# Altium PCB CW308T_CEC1702.PcbDoc
Units mil, origin at the board's own origin, x right, y up, seen from the top; angles counter-clockwise.
Board outline 2064 x 2542.07 mil, 4 copper layers (Top Layer, Ground Plane, Power, Bottom Layer), stack 33.234 mil thick; 35 components, 48 nets, 239 pads, 123 vias.
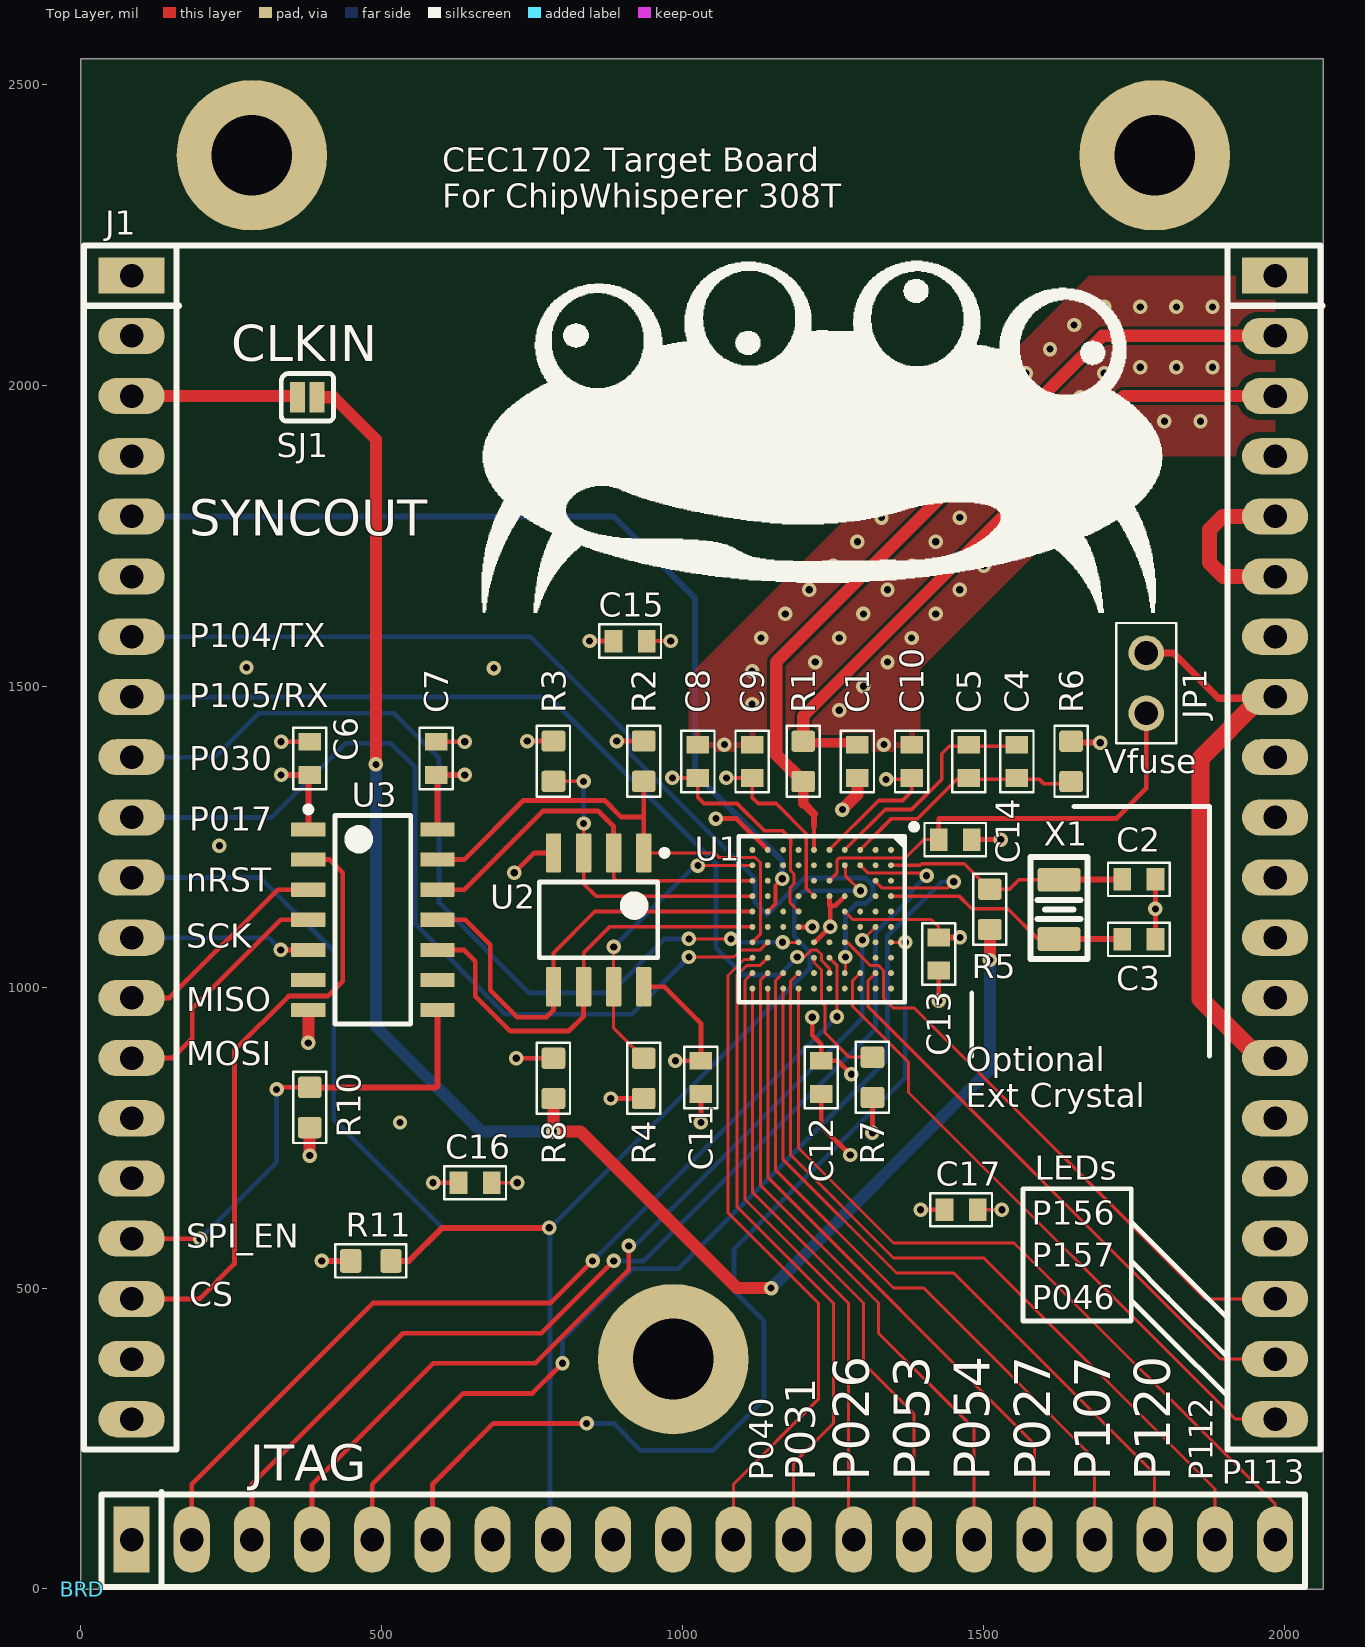
[diagram p0: Top Layer view]
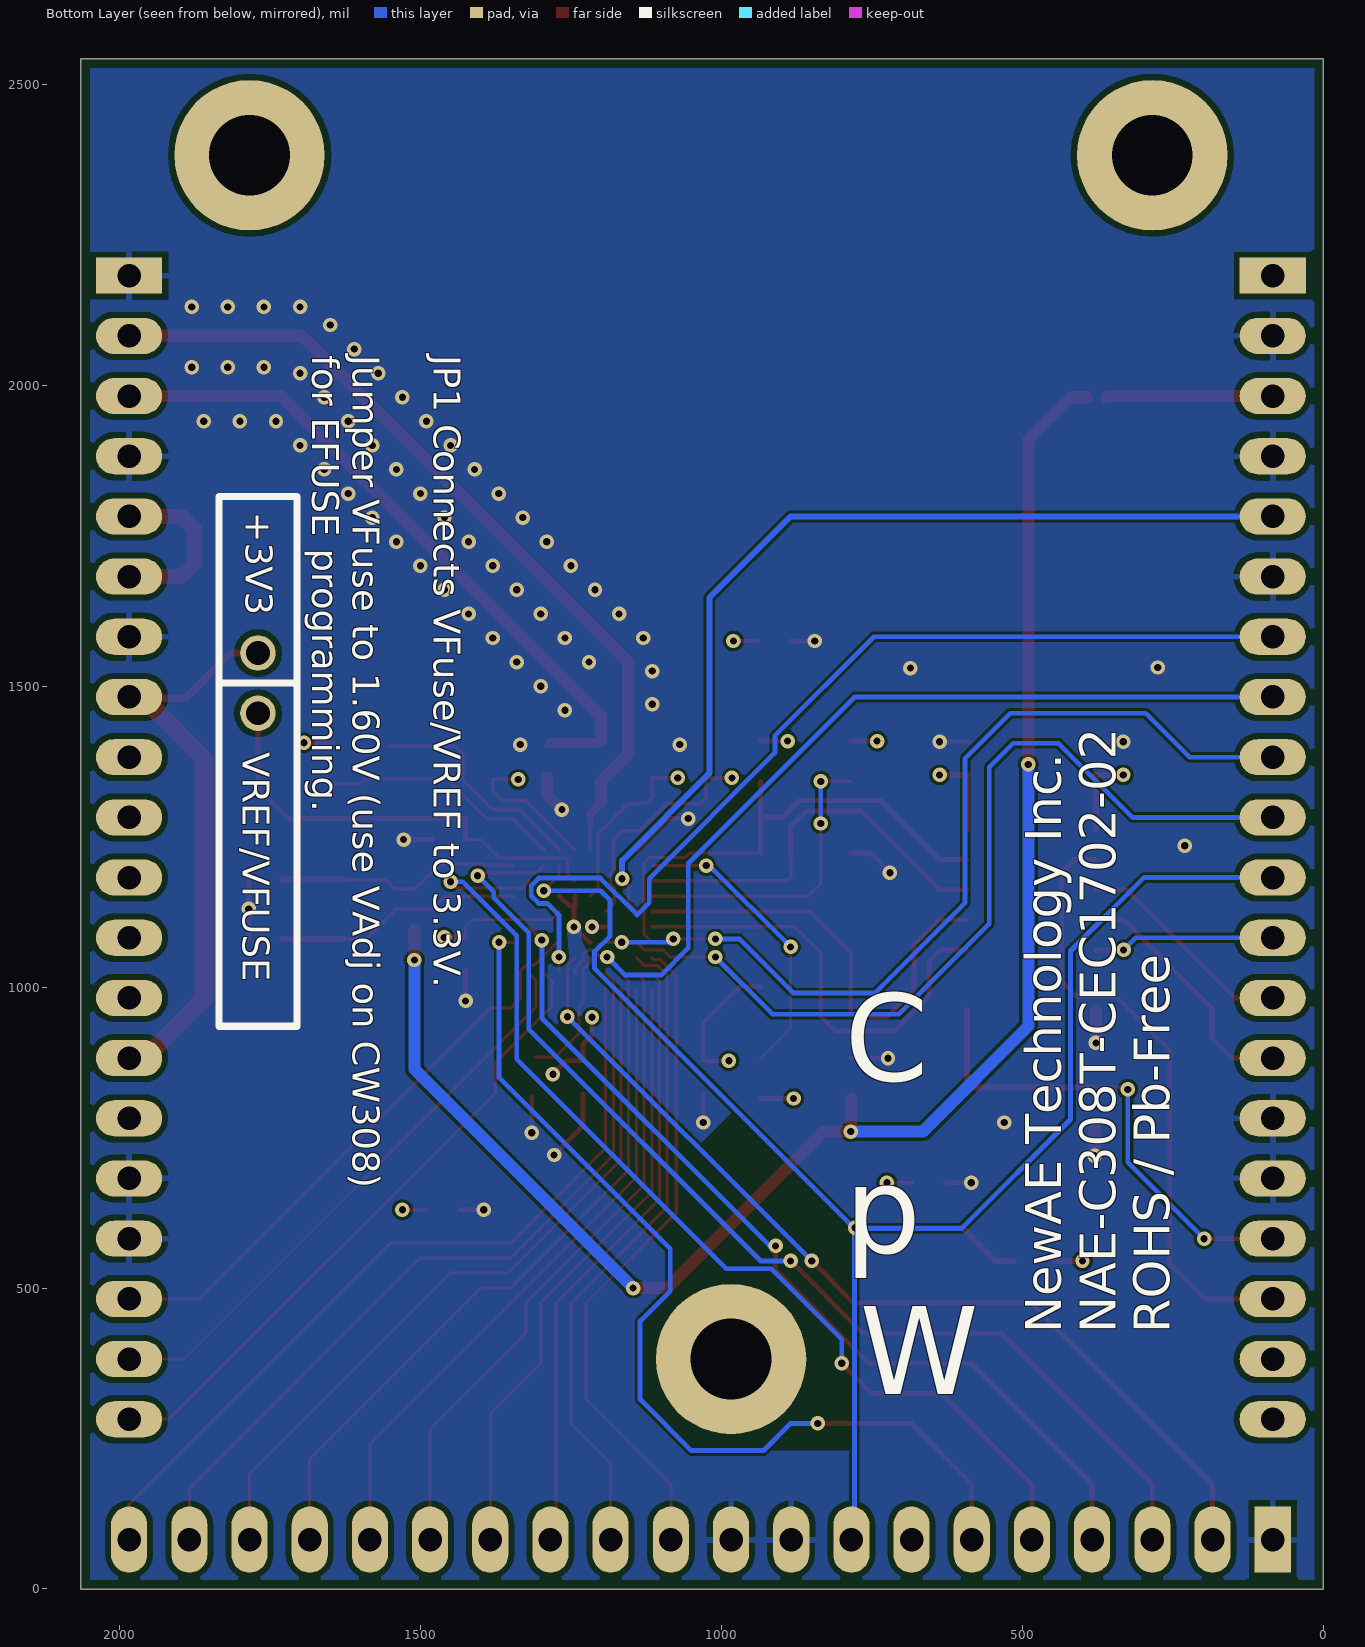
[diagram p1: Bottom Layer view, seen from below]
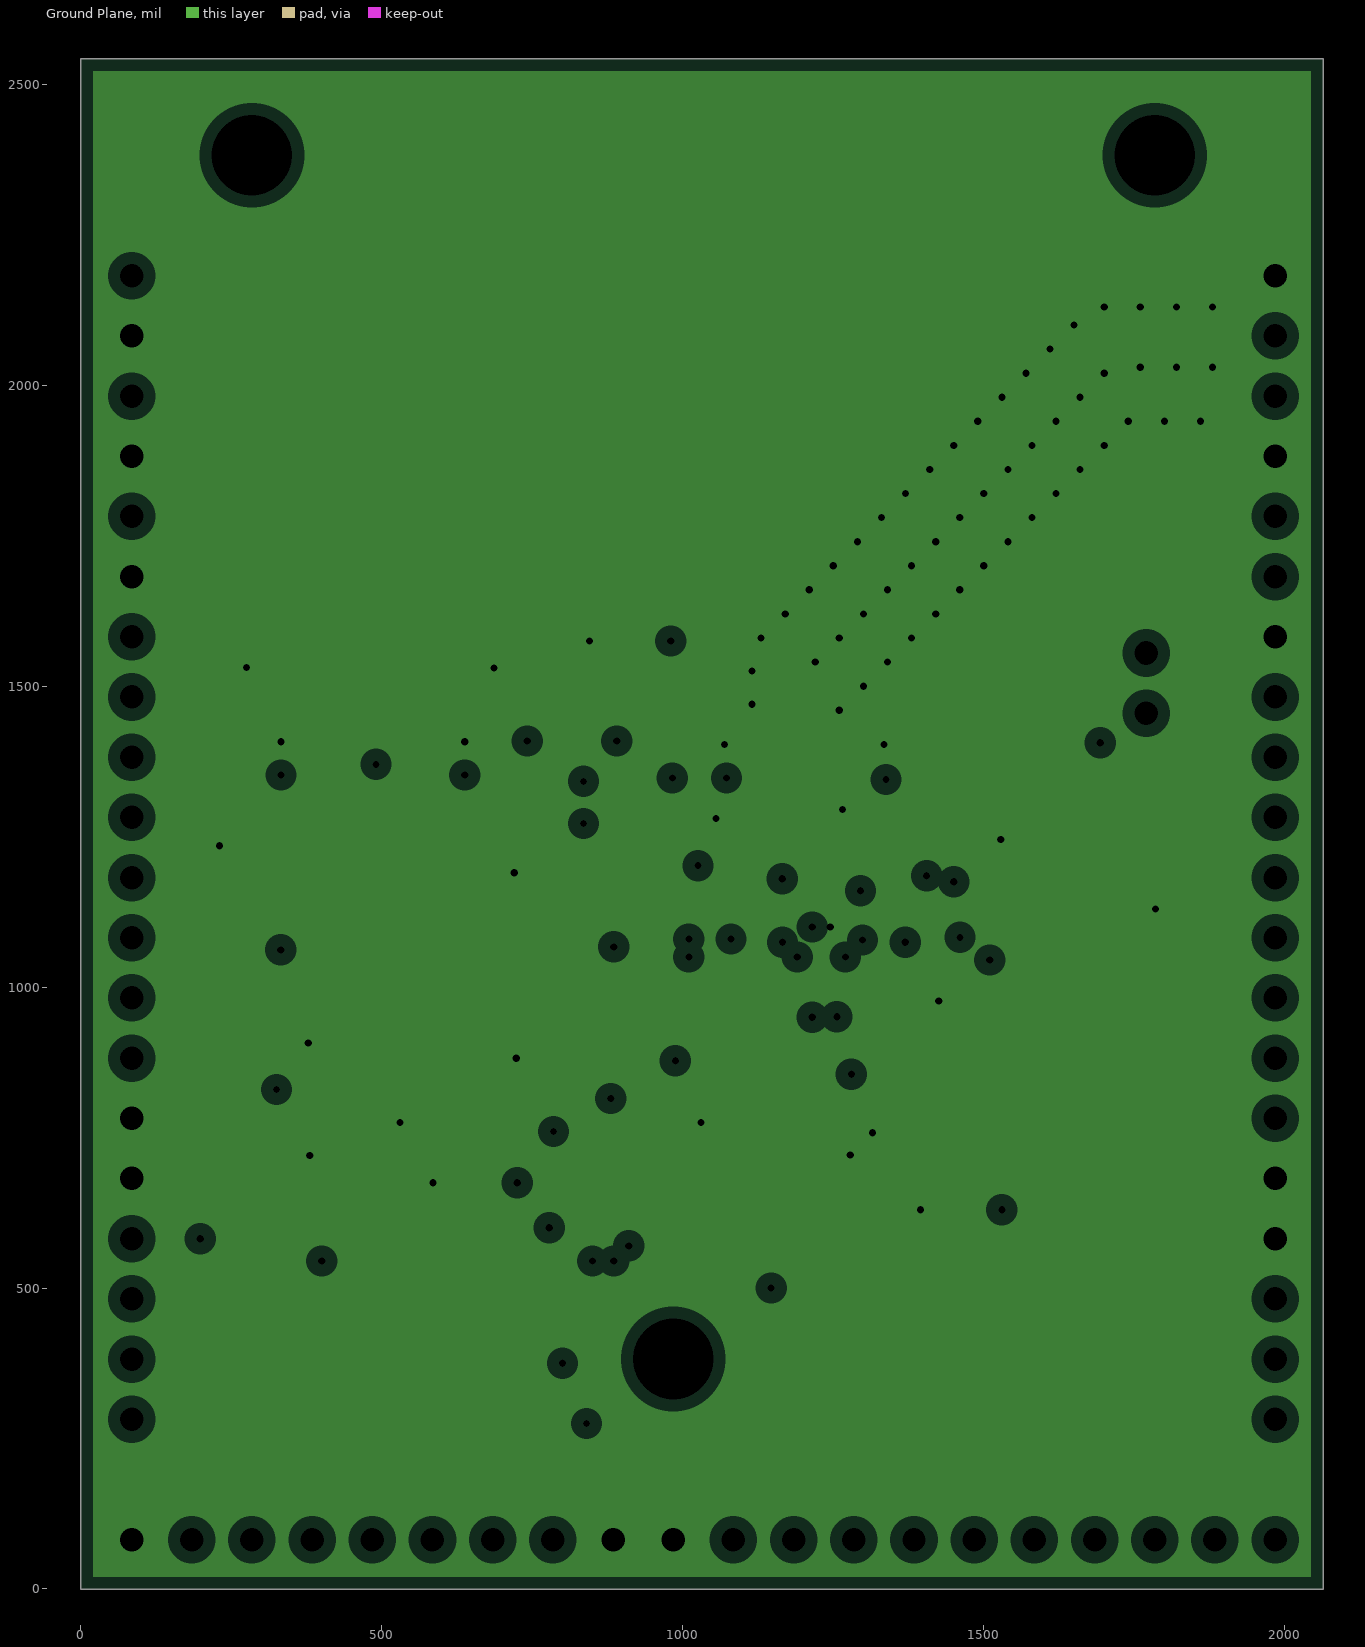
[diagram p2: Ground Plane, clearances drawn from the general rule]
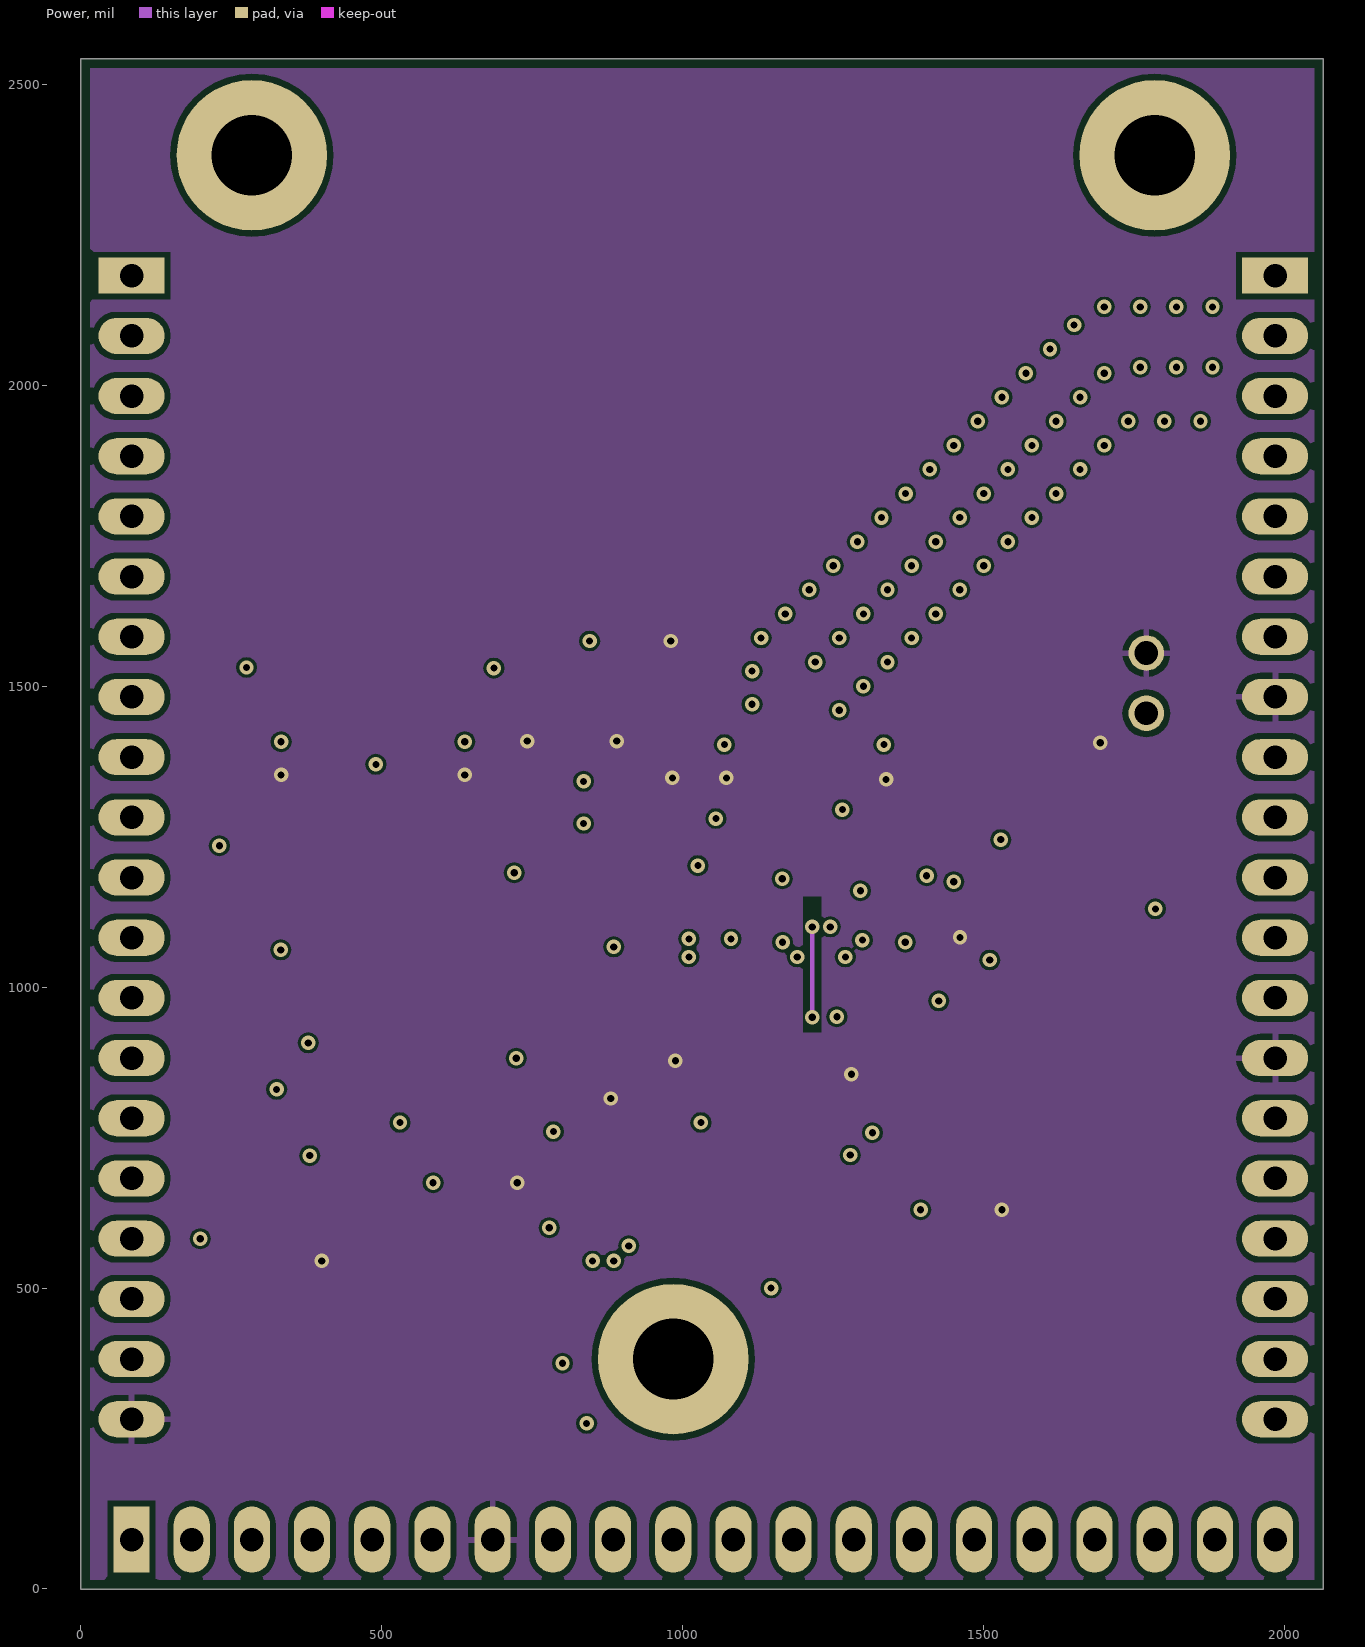
[diagram p3: Power]

## Layer stack, top to bottom
Top Solder: solder mask 0.4, Solder Resist, Dk 3.5
Top Layer: signal copper 1.4
Dielectric 1: core 12.6, FR-4, Dk 4.8
Ground Plane: plane copper 1.417, net GND
Dielectric 4: prepreg 5, Dk 4.2
Power: signal copper 1.417
Dielectric 3: core 10, FR-4, Dk 4.2
Bottom Layer: signal copper 1.4
Bottom Solder: solder mask 0.4, Solder Resist, Dk 3.5

## Board outline
0,-0.07 2064,-0.07 2064,2542 0,2542

## Design rules (kind name [scope] priority, off if disabled: settings)
BoardOutlineClearance Silk_to_Edge [InComponent('J1')] p1: gap=0 ignorepadtopadclearanceinfootprint=FALSE
BoardOutlineClearance [All] p2: gap=15 ignorepadtopadclearanceinfootprint=FALSE except(0: Arc-SplitContinuation Track-SplitContinuation SMDPad-SplitContinuation THPad-SplitContinuation Via-SplitContinuation Fill-SplitContinuation Poly-SplitContinuation Region-SplitContinuation Text-SplitContinuation)
Clearance Polygon_mask_backoff [InPolygon] p1: gap=5 ignorepadtopadclearanceinfootprint=FALSE except(10: THPad-Fill THPad-Poly THPad-Region)
Clearance [All] p2: gap=5 ignorepadtopadclearanceinfootprint=FALSE
HoleSize [All] p1: absolutevalues=TRUE maxlimit=200 minlimit=1 maxpercent=80.000 minpercent=20.000
MinimumSolderMaskSliver [All] p1: minsoldermaskwidth=5
PlaneClearance [All] p1: clearance=20
PlaneConnect PlaneConnect_viaDirect [IsVia] p1: planeconnectstyle=Direct reliefexpansion=20 reliefentries=4 reliefconductorwidth=10 reliefairgap=10
PlaneConnect [All] p2: planeconnectstyle=Relief reliefexpansion=20 reliefentries=4 reliefconductorwidth=10 reliefairgap=10
PolygonConnect PolygonConnect_viaDirect [All vs isVia] p1: connectstyle=Direct reliefconductorwidth=10 reliefentries=4 polygonreliefangle="90 Angle" airgapwidth=10
PolygonConnect [All] p2: connectstyle=Relief reliefconductorwidth=10 reliefentries=4 polygonreliefangle="90 Angle" airgapwidth=10
RoutingVias [All] p1: holewidth=28 width=50 viastyle="Through Hole" minholewidth=28 minwidth=50 maxholewidth=28 maxwidth=50 useviatemplates=TRUE viatemplateguid#1={88F1283D-34FA-4616-BE75-1AF10DC911EB} viatemplateguid#2={8DC45064-EA7F-4C5A-B7B5-789F292C9CB1} viatemplateguid#3={2AA0C7FB-5734-4B87-82FC-11746B03C04B} viatemplatename#1=v61h30m0mx0 viatemplatename#2=v86h41m0mx0 viatemplatename#3=v127h71m0mx0
SilkToSilkClearance [All] p1: silktosilkclearance=5
SilkToSolderMaskClearance [IsPad] p1: minsilkscreentomaskgap=1 clearancetoexposedcopper=TRUE
SolderMaskExpansion [All] p1: expansion=4
Width [All] p1: maxlimit=100 minlimit=5 preferedwidth=8 midlayer1_maxwidth=10 minimp=50.000000 maximp=50.000000 favimp=50.000000
24 further rules are at their usual default settings.

## Classes and differential pairs
component class CW308T_CEC1702_MICRO: BRD C1 C2 C3 C4 C5 C14 JP1 R1 R2 R3 R4 R5 R6 R7 R8 R10 R11 SJ1 U1 U2 U3 X1
component class CW308T_CEC1702_UFO: C6 C7 C8 C9 C10 C11 C12 C13 C15 C16 C17 J1

## Components (designator, comment, footprint, x,y, rotation, side; value= is the part's Value field where it differs from the comment)
BRD "CW308_TBRDSIZE" CW308T_TBOARD_DEFSIZE 2.32,-0.07 r0 top locked
C1 "1u" CAPC0603_M 1290,1375 r90 top
C2 "10p" CAPC0603_M 1757.56,1179 r180 top
C3 "10p" CAPC0603_M 1757.56,1079.21 r180 top
C4 "470n" CAPC0603_M 1555,1375 r90 top
C5 "100n" CAPC0603_M 1475,1375 r90 top
C6 "100n" CAPC0603_M 380,1380 r90 top
C7 "100n" CAPC0603_M 590,1380 r90 top
C8 "100n" CAPC0603_M 1025,1375 r90 top
C9 "100n" CAPC0603_M 1115,1375 r90 top
C10 "100n" CAPC0603_M 1380,1375 r90 top
C11 "100n" CAPC0603_M 1030,850 r270 top
C12 "100n" CAPC0603_M 1230,850 r270 top
C13 "100n" CAPC0603_M 1425,1055 r270 top
C14 "100n" CAPC0603_M 1452.56,1245 r0 top
C15 "2u2" CAPC0603_M 912.44,1575 r180 top
C16 "2u2" CAPC0603_M 655,675 r180 top
C17 "2u2" CAPC0603_M 1462.44,630 r180 top
J1 "CW308_TARGETCON" CW308_TBOARD_CONN 84,2182 r0 top locked
JP1 "Jumper" 2x2.54mm_Header 1770,1455 r90 top
R1 "10R" RESC1608X55N 1200,1375 r270 top
R2 "100k" RESC1608X55N 935,1375.26 r270 top
R3 "100k" RESC1608X55N 785,1375.26 r270 top
R4 "100k" RESC1608X55N 935,848.33 r90 top
R5 "DNM" RESC1608X55N 1510,1129.21 r90 top value=100R
R6 "100R" RESC1608X55N 1645,1375 r270 top
R7 "10k" RESC1608X55N 1315,850 r270 top
R8 "910k" RESC1608X55N 785,848.33 r270 top
R10 "100k" RESC1608X55N 380,800 r90 top
R11 "10k" RESC1608X55N 481.54,545 r0 top
SJ1 "NC" SJ_2S_NC 376.22,1980 r0 top
U1 "CEC1702" 84L_WFBGA 1230.64,1112.8 r270 top
U2 "SST26VF016B" SOIC8_NARROW 860,1111.8 r270 top
U3 "TXB0104" "SOIC14 (R-PDSO-G14)" 485,1111.8 r0 top
X1 "32.768kHz" FC-135 1625,1129.21 r270 top

## Footprints (in the part's own frame and the unit in brackets; to place one, negate y for a bottom-side part, rotate by r counter-clockwise, add the part's x,y. Pads: shape width x height; smd on the part's side, far side on the other; paste and mask are expansions set on the pad)
2x2.54mm_Header [mm]
  round 1.5 hole 1: 1(0,0) 2(2.54,0)
  silkscreen extent -1.27,-1.27 3.81,1.27, body extent -1.27,-1.27 3.81,1.27, height 9.5
84L_WFBGA [mm] "BGA, 84-Leads, Body 7.00x7.00mmx0.80mm, Pitch 0.65mm"
  round 0.25 smd paste-0.051 mask+0.05: A1(-2.925,2.925) A2(-2.275,2.925) A3(-1.625,2.925) A4(-0.975,2.925) A5(-0.325,2.925) A6(0.325,2.925) A7(0.975,2.925) A8(1.625,2.925) A9(2.275,2.925) A10(2.925,2.925) B1(-2.925,2.275) B2(-2.275,2.275) B3(-1.625,2.275) B4(-0.975,2.275) B5(-0.325,2.275) B6(0.325,2.275) B7(0.975,2.275) B8(1.625,2.275) B9(2.275,2.275) B10(2.925,2.275) C1(-2.925,1.625) C2(-2.275,1.625) C5(-0.325,1.625) C6(0.325,1.625) C9(2.275,1.625) C10(2.925,1.625) D1(-2.925,0.975) D2(-2.275,0.975) D4(-0.975,0.975) D5(-0.325,0.975) D6(0.325,0.975) D7(0.975,0.975) D9(2.275,0.975) D10(2.925,0.975) E1(-2.925,0.325) E2(-2.275,0.325) E3(-1.625,0.325) E4(-0.975,0.325) E7(0.975,0.325) E8(1.625,0.325) E9(2.275,0.325) E10(2.925,0.325) F1(-2.925,-0.325) F2(-2.275,-0.325) F3(-1.625,-0.325) F4(-0.975,-0.325) F7(0.975,-0.325) F8(1.625,-0.325) F9(2.275,-0.325) F10(2.925,-0.325) G1(-2.925,-0.975) G2(-2.275,-0.975) G4(-0.975,-0.975) G5(-0.325,-0.975) G6(0.325,-0.975) G7(0.975,-0.975) G9(2.275,-0.975) G10(2.925,-0.975) H1(-2.925,-1.625) H2(-2.275,-1.625) H5(-0.325,-1.625) H6(0.325,-1.625) H9(2.275,-1.625) H10(2.925,-1.625) J1(-2.925,-2.275) J2(-2.275,-2.275) J3(-1.625,-2.275) J4(-0.975,-2.275) J5(-0.325,-2.275) J6(0.325,-2.275) J7(0.975,-2.275) J8(1.625,-2.275) J9(2.275,-2.275) J10(2.925,-2.275) K1(-2.925,-2.925) K2(-2.275,-2.925) K3(-1.625,-2.925) K4(-0.975,-2.925) K5(-0.325,-2.925) K6(0.325,-2.925) K7(0.975,-2.925) K8(1.625,-2.925) K9(2.275,-2.925) K10(2.925,-2.925)
  silkscreen extent -4.02,-3.5 3.5,4.03, body extent -3.5,-3.5 3.5,3.5, height 0.8
CAPC0603_M [mm]
  rect 0.75x0.95 smd: 1(-0.7,0) 2(0.7,0)
  silkscreen extent -1.3,-0.7 1.3,0.7, body extent -0.85,-0.45 0.85,0.45, height 0.9
CW308_TBOARD_CONN [mil]
  rect 110x60 hole 39: A1(0,0) C1(1900,0)
  oval 110x60 hole 39: A2(0,-100) A3(0,-200) A4(0,-300) A5(0,-400) A6(0,-500) A7(0,-600) A8(0,-700) A9(0,-800) A10(0,-900) A11(0,-1000) A12(0,-1100) A13(0,-1200) A14(0,-1300) A15(0,-1400) A16(0,-1500) A17(0,-1600) A18(0,-1700) A19(0,-1800) A20(0,-1900) C2(1900,-100) C3(1900,-200) C4(1900,-300) C5(1900,-400) C6(1900,-500) C7(1900,-600) C8(1900,-700) C9(1900,-800) C10(1900,-900) C11(1900,-1000) C12(1900,-1100) C13(1900,-1200) C14(1900,-1300) C15(1900,-1400) C16(1900,-1500) C17(1900,-1600) C18(1900,-1700) C19(1900,-1800) C20(1900,-1900)
  rect 60x110 hole 39: B1(0,-2100)
  oval 60x110 hole 39: B2(100,-2100) B3(200,-2100) B4(300,-2100) B5(400,-2100) B6(500,-2100) B7(600,-2100) B8(700,-2100) B9(800,-2100) B10(900,-2100) B11(1000,-2100) B12(1100,-2100) B13(1200,-2100) B14(1300,-2100) B15(1400,-2100) B16(1500,-2100) B17(1600,-2100) B18(1700,-2100) B19(1800,-2100) B20(1900,-2100)
  round 250 hole 134: MH1(200,200) MH2(900,-1800) MH2(1700,200)
  silkscreen extent -79,-2179 1979,50, body extent -50,-2149 1950,50, height 48
CW308T_TBOARD_DEFSIZE [mil] "Default CW308T Board Size"
  body extent 80,2523 90,2538, height 1
FC-135 [mm] "Crystal, 32kHz, 32.768kHz, 2-pin"
  rrect20% 1x1.8 smd paste-0.1: 1(-1.25,0) 2(1.25,0)
  silkscreen extent -2.2,-1.2 2.1,1.2
RESC1608X55N [mm] "Chip Resistor, Body 1.6x0.8mm, EIA 0603, IPC Medium Density"
  round 0.254 on Mech15: 0(0,0)
  rrect25% 0.9x1 smd: 1(-0.85,0) 2(0.85,0)
  Top Layer pour cut-out: -0.6,0.5 0.6,0.5 0.6,-0.5 -0.6,-0.5
  silkscreen extent -1.5,-0.7 1.5,0.7, body extent -0.87,-0.47 0.88,0.48, height 0.54
SJ_2S_NC [mil] "Solder Jumper, closed with solder paste"
  rect 25x50 smd: 1(-16.22,0) 2(16.22,0)
  silkscreen extent -43,-39 43,39
SOIC8_NARROW [mm] "SOIC, 8-Leads, Body 5x4mm, Pitch 1.27mm, IPC Low Density"
  rrect15% 1.65x0.65 smd: 1(-2.825,1.905) 2(-2.825,0.635) 3(-2.825,-0.635) 4(-2.825,-1.905) 5(2.825,-1.905) 6(2.825,-0.635) 7(2.825,0.635) 8(2.825,1.905)
  silkscreen extent -2.95,-2.5 1.6,2.91, body extent -3,-2.45 3,2.45, height 1.63
"SOIC14 (R-PDSO-G14)" [mm] "SOIC, 14-Leads, Body 8.65x3.90mm, Pitch 1.27mm, IPC Medium Density"
  rrect10% 1.45x0.6 smd: 1(-2.725,3.81) 2(-2.725,2.54) 3(-2.725,1.27) 4(-2.725,0) 5(-2.725,-1.27) 6(-2.725,-2.54) 7(-2.725,-3.81) 8(2.725,-3.81) 9(2.725,-2.54) 10(2.725,-1.27) 11(2.725,0) 12(2.725,1.27) 13(2.725,2.54) 14(2.725,3.81)
  silkscreen extent -2.85,-4.4 1.6,4.78, body extent -3,-4.4 3,4.4, height 1.75

## Part data
BRD: library part CW308T_BRDSHAPE_DEFAULT, "308T Board Outline (Layer 1)", Component Group=Mechanical, Component Type=Mechanical, Part Number=CW308T_BRDSHAPE_DEFAULT
C1: library part CCHIP-1u-0603, "1u, 0603, 50V", Case-EIA=0603, Case-Metric=1608, Manufacture Part Number 1=CL10A105KB8NNNC, Rated Voltage=50V, Supplier Part Number 1=1276-1860-1-ND, Component Group=Capacitor, Component Type=Standard, Mounting Technology=SMT, Part Number=CCHIP-1u-0603, Pin Count=2, Supplier 1=Digi-Key
C2 C3: library part CCHIP-10p-0603, "10p, 0603", Case-EIA=0603, Case-Metric=1608, Component Group=Capacitor, Component Type=Standard, Mounting Technology=SMT, Part Number=CCHIP-10p-0603, Pin Count=2
C4: library part CCHIP-470n-0603-50V, "470n, 0603, 50V", Case-EIA=0603, Manufacture 1="Taiyo Yuden", Manufacture Part Number 1=UMK107B7474KA-TR, Rated Voltage=50V, Supplier Part Number 1=587-3170-1-ND, Temperature Range="-55C to 125C", Component Group=Capacitor, Component Type=Standard, Mounting Technology=SMT, Part Number=CCHIP-470n-0603-50V, Pin Count=2, RoHS=Yes, Supplier 1=Digi-Key
C5 C6 C7 C8 C9 C10 C11 C12 C13 C14: library part CCHIP-100n-0603, "100n, 0603", Case-EIA=0603, Case-Metric=1608, Manufacture 1=Kemet, Manufacture Part Number 1=C0603C104K5RACTU, Rated Voltage=50V, Supplier Part Number 1=399-5089-2-ND, Component Group=Capacitor, Component Type=Standard, Mounting Technology=SMT, Part Number=CCHIP-100n-0603, Pin Count=2, Supplier 1=Digi-Key
C15 C16 C17: library part CCHIP-2u2-0603, "2u2, 0603", Case-EIA=0603, Case-Metric=1608, Manufacture 1=Samsung, Manufacture Part Number 1=CL10B225KP8NNNC, Supplier Part Number 1=1276-1134-2-ND, Component Group=Capacitor, Component Type=Standard, Mounting Technology=SMT, Part Number=CCHIP-2u2-0603, Pin Count=2, Supplier 1=Digi-Key
J1: library part CW308_TBOARD, "CW308 \"Standard\" Target Board Connector", Component Group=Mechanical, Component Type=Standard, Mounting Technology=Through-hole, Part Number=CW308_TBOARD, Pin Count=60, Pitch=2.54mm
JP1: library part 2_PIN_JUMPER, "1x2 2.54mm header, male pins", Manufacture 1=Harwin, Manufacture Part Number 1=M20-9990246, Supplier Part Number 1=952-2262-ND, Component Group="PCB Feature", Component Type=Standard, Mounting Technology=Through-hole, Part Number=2_PIN_JUMPER, Pin Count=2, PP Material Stack=0, PP Rotation=0, RoHS=Yes, Supplier 1=Digi-Key
R1: library part RCHIP-10R-0603, "10R res, 0603, 1%, 1/10W", Case-EIA=0603, Case-Metric=1608, Manufacture 1=Yageo, Manufacture Part Number 1=RC0603FR-0710RL, Rated Power=0.1W, Rated Voltage=75VDC, Supplier Part Number 1=311-10.0HRCT-ND, Temperature Range="-55C to 155C", Tolerance=1%, Component Group=Resistor, Component Type=Standard, Mounting Technology=SMT, Part Number=RCHIP-10R-0603, Pin Count=2, Supplier 1=Digi-Key
R2 R3 R4 R10: library part RCHIP-100K-0603, "100k res, 0603, 1%, 1/10W", Case-EIA=0603, Case-Metric=1608, Manufacture 1=Yageo, Manufacture Part Number 1=RC0603FR-07100KL, Rated Power=0.1W, Rated Voltage=75VDC, Supplier Part Number 1=311-100KHRCT-ND, Temperature Range="-55C to 155C", Tolerance=1%, Component Group=Resistor, Component Type=Standard, Mounting Technology=SMT, Part Number=RCHIP-100K-0603, Pin Count=2, Supplier 1=Digi-Key
R5 R6: library part RCHIP-100R-0603, "100R res, 0603, 1%, 1/10W", Case-EIA=0603, Case-Metric=1608, Manufacture 1=Yageo, Manufacture Part Number 1=RC0603FR-07100RL, Rated Power=0.1W, Rated Voltage=75VDC, Supplier Part Number 1=311-100HRCT-ND, Temperature Range="-55C to 155C", Tolerance=1%, Component Group=Resistor, Component Type=Standard, Mounting Technology=SMT, Part Number=RCHIP-100R-0603, Pin Count=2, Supplier 1=Digi-Key
R7 R11: library part RCHIP-10K-0603, "10k res, 0603, 1%, 1/10W", Case-EIA=0603, Case-Metric=1608, Manufacture 1=Yageo, Manufacture Part Number 1=RC0603FR-0710KL, Rated Power=0.1W, Rated Voltage=75VDC, Supplier Part Number 1=311-10.0KHRCT-ND, Temperature Range="-55C to 155C", Tolerance=1%, Component Group=Resistor, Component Type=Standard, Mounting Technology=SMT, Part Number=RCHIP-10K-0603, Pin Count=2, Supplier 1=Digi-Key
R8: library part RCHIP-910K-0603, "910k res, 0603, 1%, 1/10W", Case-EIA=0603, Case-Metric=1608, Manufacture 1=Yageo, Manufacture Part Number 1=RC0603FR-07910KL, Rated Power=0.1W, Rated Voltage=75VDC, Supplier Part Number 1=311-910KHRCT-ND, Temperature Range="-55C to 155C", Tolerance=1%, Component Group=Resistor, Component Type=Standard, Mounting Technology=SMT, Part Number=RCHIP-910K-0603, Pin Count=2, Supplier 1=Digi-Key
SJ1: library part SJ_2S, "Solder Jumper, NC", Component Group="PCB Feature", Component Type="Standard (No BOM)", Mounting Technology=COPPER, Part Number=SJ_2S, Pin Count=2
U1: "CEC1702, 84WFBGA, microchip hardware crypto", Manufacture 1=Microchip, Manufacture Part Number 1=CEC1702Q-B1-SX-TR, Supplier Part Number 1=CEC1702Q-B1-SX-CT-ND, Component Group="Digital IC", ComponentLink1Description=Datasheet, ComponentLink1URL=http://ww1.microchip.com/downloads/en/DeviceDoc/00002207B.pdf, Component Type=Standard, Mounting Technology=SMT, Part Number=CEC1702, Pin Count=84, PP Material Stack=0, PP Rotation=0, RoHS=Yes, Supplier 1=Digi-Key
U2: "IC FLASH 16MBIT 104MHZ 8SOIC", Manufacture 1=Microchip, Manufacture Part Number 1=SST26VF016B-104I/SN, Supplier Part Number 1=SST26VF016B-104I/SN-ND, Component Group="Digital IC", Component Type=Standard, Mounting Technology=SMT, Part Number=SST26VF016B, Pin Count=8, PP Material Stack=0, PP Rotation=0, Supplier 1=Digi-Key
U3: library part TXB0104DR, "IC 4BIT NON-INV TRANSLTR 14-SOIC", Manufacture 1="Texas Instruments", Supplier Part Number 1=296-21928-1-ND, Component Group="Digital IC", Component Type=Standard, Manufacture Part Number 1=TXB0104DR, Mounting Technology=SMT, Part Number=TXB0104DR, Pin Count=14, PP Material Stack=0, PP Rotation=0, RoHS=Yes, Supplier 1=Digi-Key
X1: library part FC-135, "Crystal, 32kHz, 32.768kHz, 2-pin", Manufacture 1=EPSON, Manufacture Part Number 1="FC-135 32.7680KA-K0", Supplier Part Number 1=SER4087CT-ND, Component Group=Crystal, Component Type=Standard, Mounting Technology=SMT, Part Number=FC-135, Pin Count=2, PP Material Stack=0, PP Rotation=0, Supplier 1=Digi-Key

## Via types
v1: diameter 24, hole 12, Top Layer to Bottom Layer, tented both sides, 123 vias

## Nets (pads, with @x,y where several pads share a name; then routed paths per layer and width w, separated by ;. In a path a pad name is that pad's centre, name@x,y a point inside that pad or via, vN(x,y) a via of type N, cw(c..) or ccw(c..) an arc to the next point about the centre after c; other vN are vias at no path point)
3v3: C6.1 C7.1 C8.1 C9.1 C10.1 C11.1 C12.1 C13.1 C15.1 C16.1 C17.1 J1.A20 J1.B7 J1.C8 J1.C14 JP1.2 R2.1 R3.1 R4.1 R6.1 R11.1 U1.D5 U1.E1 U1.F4 U1.G5 U1.G6 U2.8 U3.1 U3.14 | length 3275
  Top Layer w5: 1179.08,1235.92 1179.08,1193.49 1184.5,1188.08 1184.5,1171.92 1177.84,1165.27 1177.84,1140 U1.G5 ; 1205,1255 1205,1164.02 U1.F4 ; U1.D5 1282.19,1112.42 1412.58,1112.42 1425,1100 C13.1
  Top Layer w6: C16.1 v1(725,675) ; C15.1 v1(980,1575) ; v1(982.56,1347.44) C8.1 1025,1315 1035,1305 1090,1305 1135,1260 1165,1260 1179.08,1245.92 1179.08,1235.92 ; v1(1072.44,1347.44) C9.1 1115,1315 1125,1305 1155,1305 1205,1255 ; U1.E1 1325.48,1310 1365,1310 1380,1325 1380,1345 v1(1337.56,1345) ; C17.1 v1(1530,630)
  Top Layer w8: v1(741.28,1408.72) R3.1 ; v1(880.13,814.87) R4.1 ; v1(890,1408.72) R2.1 ; U2.8 969.43,1000.57 1030,940 C11.1 v1(987.56,877.56) ; U1.G6 v1(1215,1100) ; v1(1215,950) 1215,920 1230,905 C12.1 1257.44,877.56 v1(1280,855)
  Top Layer w10: v1(332.44,1352.44) C6.1 377.72,1350.16 U3.1 ; v1(400,545) R11.1 ; U3.14 592.28,1350.16 C7.1 v1(637.56,1352.44) ; C13.1 v1(1460.44,1082.56) ; R6.1@1645,1406.02 v1(1693.46,1406.02)
  Top Layer w12: JP1.2 1815,1555 1890,1480 1960,1480 1982,1480 J1.C8
  Top Layer w30: J1.C8@1960,1480 1860,1380 1860,980 1958,882 J1.C14
  Power w8: v1(1215,950) v1(1215,1100)
CLK_IN: J1.A3 SJ1.1 | length 276.8
  Top Layer w20: J1.A3 358,1982 SJ1.1
CLK_OUT: J1.A5 U1.J5 | length 1583.2
  Top Layer w6: U1.J5 1153.99,1138.51 1153.99,1168.99 v1(1165,1180)
  Bottom Layer w10: J1.A5 884.8,1782 1020,1646.8 1020,1355 1165,1210 v1(1165,1180)
FLASH_CS: R2.2 U1.K7 U2.1 U3.13 | length 851.9
  Top Layer w5: U2.1 1051.98,1223.02 1059.47,1215.53 1120,1215.53 1128.65,1206.88 1128.65,1087.58 U1.K7
  Top Layer w8: U3.13 636.8,1211.8 735,1310 870,1310 897.59,1282.41 935,1282.41 ; U2.1 935,1282.41 ; R2.2 935,1282.41
FLASH_SCK: U1.K6 U2.6 U3.10 | length 746.3
  Top Layer w6: U2.6 835,1056.8 878.2,1100 U1.K6
  Top Layer w8: U3.10 636.19,1061.8 655,1042.98 655,985 713.2,926.8 810,926.8 835,951.8 U2.6
FLASH_SIO0: U1.K5 U2.5 U3.11 | length 762.5
  Top Layer w6: U2.5 785,1056.8 853.8,1125.59 U1.K5
  Top Layer w8: U3.11 638.2,1111.8 680,1070 680,995 725,950 773.2,950 785,961.8 U2.5
FLASH_SIO1: U1.K3 U2.2 U3.12 | length 675.3
  Top Layer w6: U2.2 885,1181.8 890.02,1176.77 U1.K3
  Top Layer w8: U3.12 636.8,1161.8 767.8,1292.8 859,1292.8 885,1266.8 U2.2
FLASH_SIO2: R3.2 U1.K4 U2.3 | length 509
  Top Layer w6: R3.2 v1(835,1341.8) ; v1(835,1271.8) U2.3 835,1171.8 855.61,1151.18 U1.K4
  Bottom Layer w8: v1(835,1271.8) v1(835,1341.8)
FLASH_SIO3: R4.2 U1.K2 U2.7 | length 492.3
  Top Layer w5: v1(885,1066.8) U2.7 885,931.8 R4.2 ; v1(1025,1201.8) 1025.57,1202.36 U1.K2
  Bottom Layer w5: v1@1020,1201.8 v1(1025,1201.8)
  Bottom Layer w8: v1(885,1066.8) v1@1020,1201.8
FLT_PLL: C4.2 C5.2 U1.D1 | length 382.2
  Top Layer w6: U1.D1 1336.07,1295 1380,1295 1430,1345 1430,1387.56 1442.56,1400.12 C4.2@1555,1400.12
GND: C1.1 C2.1 C3.1 C6.2 C7.2 C8.2 C9.2 C10.2 C11.2 C12.2 C13.2 C14.2 C15.2 C16.2 C17.2 J1.A2 J1.A4 J1.A6 J1.A15 J1.A16 J1.B1 J1.B9 J1.B10 J1.C1 J1.C4 J1.C7 J1.C16 J1.C17 R7.2 R8.1 R10.1 U1.D4 U1.E4 U1.F7 U1.J1 U2.4 U3.7 | length 1177.7
  Top Layer w8: v1(332.44,1407.56) C6.2 ; v1(585,675) C16.2 ; C7.2 v1(637.56,1407.56) ; v1(720,1190) 753.02,1223.02 U2.4 ; v1(723.2,881.8) R8.1 ; v1(845,1575) C15.2 ; v1(1030,775) C11.2 ; v1(1055,1280) 1089.02,1280 U1.J1 ; U1.F7 1219.41,1074.41 v1(1245,1100) v1@1245,1101.57 ; C12.2 1230,769 v1(1278,721) ; U1.E4 1243.43,1135 ; v1@1244.22,1100.78 v1@1245,1101.57 ; U1.D4 1252.84,1135 1243.43,1135 ; v1(1315,758) R7.2 ; v1(1395,630) C17.2 ; v1(1425,977) C13.2 ; C14.2 v1(1528,1245) ; C3.1 v1(1785.12,1129.88) C2.1 ; 1243.43,1135 1245,1133.43 v1@1245,1101.57
  Top Layer w20: v1(377.72,907.28) U3.7 ; v1(380,720) R10.1 ; v1(1265,1295) 1290,1320 C1.1
  other v1: 530,775 230,1235 1069,1403 1334,1403 1260,1460 1115,1470 1300,1500 1115,1525 686,1530 275,1531 1220,1540 1340,1540 1130,1580 1260,1580 1380,1580 1170,1620 1300,1620 1420,1620 1210,1660 1340,1660 1460,1660 1250,1700 1380,1700 1500,1700 1290,1740 1420,1740 1540,1740 1330,1780 1460,1780 1580,1780 1370,1820 1500,1820 1620,1820 1410,1860 1540,1860 1660,1860 1450,1900 1580,1900 1700,1900 1490,1940 1620,1940 1740,1940 1800,1940 1860,1940 1530,1980 1660,1980 1570,2020 1700,2020 1760,2030 1820,2030 1880,2030 1610,2060 1650,2100 1700,2130 1760,2130 1820,2130 1880,2130
J_TCK: J1.B6 U1.A7 | length 1660.2
  Top Layer w5: U1.A7 v1(1369.41,1074.41)
  Top Layer w8: J1.B6 584,174 685,275 v1(840,275)
  Bottom Layer w8: v1(840,275) 885,275 930,230 1050,230 1135,315 1135,445 1085,495 1085,565 1369.41,849.41 v1(1369.41,1074.41)
J_TDI: J1.B3 U1.C2 | length 1848.9
  Top Layer w5: U1.C2 1307.78,1189.19 1400.81,1189.19 v1(1405,1185)
  Top Layer w8: J1.B3 284,174 535,425 765,425 v1(885,545)
  Bottom Layer w8: v1(885,545) 935,545 1320,930 1320,1090 1378.28,1148.28 1378.28,1158.28 v1(1405,1185)
J_TDO: J1.B4 U1.B6 | length 1511.4
  Top Layer w5: v1(1298.28,1078.08) U1.B6
  Top Layer w8: J1.B4 384,174 585,375 755,375 910,530 v1(910,570)
  Bottom Layer w5: v1@1298.08,1078.08 v1(1298.28,1078.08)
  Bottom Layer w8: v1(910,570) 920,570 1298.08,948.08 v1@1298.08,1078.08
J_TMS: J1.B5 U1.B3 | length 1756.4
  Top Layer w5: U1.B3 1320.2,1175.2 1331.06,1164.35 1439.35,1164.35 v1(1450,1175)
  Top Layer w8: J1.B5 484,174 635,325 750,325 v1(800,375)
  Bottom Layer w8: v1(800,375) 800,415 917,532 992,532 1340,880 1340,1085 1430,1175 v1(1450,1175)
J_TRST: J1.B2 U1.E8 | length 1588.7
  Top Layer w5: U1.E8 1255.85,1036.4 v1(1255.85,950.85)
  Top Layer w8: J1.B2 184,174 485,475 780,475 v1(850,545)
  Bottom Layer w8: v1(850,545) v1(1255.85,950.85)
LED_1: J1.C18 U1.D7 | length 987.3
  Top Layer w5: U1.D7 1273.17,1074.41 1311.93,1035.65 1325.35,1035.65 1333.37,1027.63 1333.37,981.63 1350,965 1385,965 1868,482 J1.C18
LED_2: J1.C19 U1.B9 | length 979.8
  Top Layer w5: U1.B9 1307.78,1010.81 1307.78,967.22 1893,382 J1.C19
LED_3: J1.C20 U1.C9 | length 1076.4
  Top Layer w5: U1.C9 1281.44,1010.06 1281.44,968.56 1375,875 1375,825 1918,282 J1.C20
NetC2_2: C2.2 R5.2 U1.A2 X1.1 | length 409.6
  Top Layer w6: U1.A2 1394.08,1202.36 1396.72,1205 1467.68,1205 R5.2 1542.68,1162.68 1558.43,1178.43 X1.1
  Top Layer w10: X1.1 1729.43,1178.43 C2.2
NetC3_2: C3.2 U1.A4 X1.2 | length 414
  Top Layer w6: U1.A4 1458.82,1151.18 1480,1130 1540,1130 1590,1080 X1.2 ; C3.2@1729.21,1080 C3.2
  Top Layer w10: X1.2 C3.2@1729.21,1080
NetC14_1: C14.1 JP1.1 U1.E3 | length 751.4
  Top Layer w5: U1.E3@1246.77,1176.77 U1.E3 1255.85,1189.19 1255.85,1210.64 1260,1214.78 1369.78,1214.78 1400,1245 C14.1
  Top Layer w8: C14.1 1425,1280 1720,1280 1770,1330 JP1.1
NetJ1_C5: J1.C5 J1.C6 | length 291.6
  Top Layer w25: J1.C6 1898,1682 1875,1705 1875,1760 1897,1782 J1.C5
NetR5_1: R5.1 R8.2 SJ1.2 | length 2739.5
  Top Layer w20: SJ1.2 420,1980 490,1910 v1(490,1370) ; R8.2 v1(785,760) 830,760 1090,500 v1(1146.63,500) ; v1(1510,1045) R5.1
  Bottom Layer w20: v1(490,1370) 490,935 665,760 v1(785,760) ; v1(1146.63,500) 1510,863.37 v1(1510,1045)
NetR7_1: R7.1 U1.F8 | length 223.1
  Top Layer w5: U1.F8 1217.84,1040.79 1230.26,1028.37 1230.26,974.74 1236.35,968.65 1236.35,923.65 1276.54,883.46 R7.1@1310,883.46
PG7: J1.A9 U1.G7 | length 1511.3
  Top Layer w5: v1(1010,1080) v1(1080,1080) ; v1(1165.59,1074.41) U1.G7
  Bottom Layer w5: v1(1080,1080) v1@1085.59,1074.41
  Bottom Layer w8: J1.A9 222,1382 295,1455 520,1455 595,1380 595,1140 745,990 880,990 970,1080 v1(1010,1080) ; v1@1085.59,1074.41 v1(1165.59,1074.41)
PG9: J1.B19 U1.G9 | length 1326.5
  Top Layer w5: U1.G9 1179.08,1010.06 1179.08,720.92 1350,550 1500,550 1884,166 J1.B19
PG10: J1.B20 U1.G10 | length 1360.7
  Top Layer w5: U1.G10 1192.25,732.75 1350,575 1550,575 1984,141 J1.B20
PH9: J1.B17 U1.H9 | length 1195.1
  Top Layer w5: U1.H9 1154.24,1010.81 1154.24,695.76 1350,500 1400,500 1684,216 J1.B17
PH10: J1.B18 U1.H10 | length 1227
  Top Layer w5: U1.H10 1166.66,713.34 1355,525 1450,525 1784,191 J1.B18
PJ7: J1.A10 U1.J7 | length 1496.2
  Top Layer w5: v1(1010,1050) 1085,1050 1096.99,1061.99 1128.65,1061.99 U1.J7
  Bottom Layer w8: J1.A10 317,1282 440,1405 515,1405 555,1365 555,1105 705,955 915,955 v1(1010,1050)
PJ8: J1.B12 U1.J8 | length 1094.6
  Top Layer w5: U1.J8 1127.9,1035.65 1105.65,1035.65 1090,1020 1090,635 1250,475 1250,275 1184,209 J1.B12
PJ9: J1.B15 U1.J9 | length 1093.6
  Top Layer w5: U1.J9 1128.65,1010.81 1128.65,671.35 1325,475 1325,425 1484,266 J1.B15
PJ10: J1.B16 U1.J10 | length 1099.1
  Top Layer w5: U1.J10 1141.07,683.93 1584,241 J1.B16
PK8: J1.B11 U1.K8 | length 1110.5
  Top Layer w5: J1.B11 1084,174 1225,315 1225,475 1075,625 1075,1019.14 1101.51,1045.65 1112.31,1045.65 U1.K8
PK9: J1.B13 U1.K9 | length 1021.3
  Top Layer w5: U1.K9 1103.06,1010.81 1103.06,646.94 1275,475 1275,91 J1.B13
PK10: J1.B14 U1.K10 | length 1026.9
  Top Layer w5: U1.K10 1115.48,659.52 1300,475 1300,375 1384,291 J1.B14
PORT_CS: J1.A18 U3.2 | length 1024
  Top Layer w8: J1.A18 197,482 255,540 255,895 345,985 410,985 435,1010 435,1190 413.2,1211.8 U3.2
PORT_OE: J1.A17 R10.2 U3.8 | length 810.3
  Top Layer w8: J1.A17 v1(198,582) ; v1(325,830) 328.46,833.46 R10.2
  Top Layer w10: R10.2 590,833.46 592.28,835.75 U3.8
  Bottom Layer w8: v1(198,582) 325,709 v1(325,830)
PORT_SCK: J1.A12 U3.5 | length 302.1
  Top Layer w8: v1(331.8,1061.8) U3.5
  Bottom Layer w8: J1.A12 311.59,1082 v1(331.8,1061.8)
PORT_SIO0: J1.A14 U3.4 | length 418.2
  Top Layer w8: J1.A14 152,882 185,915 185,965 331.8,1111.8 U3.4
PORT_SIO1: J1.A13 U3.3 | length 368.2
  Top Layer w8: J1.A13 147,982 326.8,1161.8 U3.3
RST: J1.A11 J1.B8 R11.2 U1.D2 | length 2811.3
  Top Layer w5: U1.D2 1270,1201.39 1270,1185 v1(1295,1160)
  Top Layer w10: R11.2 545,545 600,600 v1(778,600)
  Bottom Layer w8: J1.A11 298,1182 420,1060 420,780 601,599 v1@779,599 ; J1.B8 779,87 v1@779,599 ; v1(1295,1160) 1200.82,1160 1185,1144.18 1185,1084.7 1211,1058.7 1211,1031 v1@779,599
  Bottom Layer w10: v1(778,600) v1@779,599
SHUNTH: C1.2 J1.C3 R1.1 | length 1138.3
  Top Layer w8: C1.2@1284.09,1406.02 C1.2@1290,1400.12
  Top Layer w16: R1.1@1200,1406.02 C1.2@1284.09,1406.02
  Top Layer w20: R1.1 1200,1450 1732,1982 J1.C3
SHUNTL: J1.C2 R1.2 U1.F1 | length 1392.6
  Top Layer w6: U1.F1 1217.84,1267.84
  Top Layer w10: 1217.84,1267.84 1217.84,1287.84
  Top Layer w12: R1.2@1200,1339.09 R1.2@1203.46,1339.09
  Top Layer w14: 1200,1305.68 1217.84,1287.84
  Top Layer w18: 1200,1305.68 R1.2@1200,1339.09
  Top Layer w21: R1.2 1155,1386.54 1155,1540 1697,2082 J1.C2
UART_RX: J1.A8 U1.E9 | length 1476.1
  Top Layer w5: v1(1190,1050) 1201.46,1050 1212.7,1061.24 1222.99,1061.24 1230.26,1053.96 1230.26,1044.42 1243.43,1031.25 U1.E9
  Bottom Layer w8: J1.A8 778.3,1482 1055,1205.3 1055,1065 1100,1020 1160,1020 v1(1190,1050)
UART_TX: J1.A7 U1.D9 | length 1667.3
  Top Layer w5: U1.D9 1270,1024.2 v1(1270,1050)
  Bottom Layer w8: J1.A7 746.42,1582 911,1417.42 911,1389 1120,1180 1120,1140 1140,1120 1201,1181 1303.7,1181 1316,1168.7 1316,1151.3 1303.7,1139 1289,1139 1270,1120 v1(1270,1050)
VTR_PLL: C4.1 C5.1 R6.2 U1.C1 | length 402.6
  Top Layer w6: U1.C1 1346.66,1280 1390,1280 1455,1345 1592.56,1345 1600,1337.56 1643.46,1337.56 R6.2@1645,1339.09
pads on no net: J1.A1 J1.A19 J1.C9 J1.C10 J1.C11 J1.C12 J1.C13 J1.C15 J1.MH1 J1.MH2 R1.0 R2.0 R3.0 R4.0 R5.0 R6.0 R7.0 R8.0 R10.0 R11.0 U1.A1 U1.A3 U1.A5 U1.A6 U1.A8 U1.A9 U1.A10 U1.B1 U1.B2 U1.B4 U1.B5 U1.B7 U1.B8 U1.B10 U1.C5 U1.C6 U1.C10 U1.D6 U1.D10 U1.E2 U1.E7 U1.E10 U1.F2 U1.F3 U1.F9 U1.F10 U1.G1 U1.G2 U1.G4 U1.H1 U1.H2 U1.H5 U1.H6 U1.J2 U1.J3 U1.J4 U1.J6 U1.K1 U3.6 U3.9

## Polygon pours and split planes (outlines as drawn)
GND on Top Layer "Shunt_GND" (solid, remove dead copper, pour order 10): 1984,2182 1675,2182 1010,1517 1010,1391 1388,1391 1394,1397 1394,1528 1748,1882 1984,1882
3v3 on Power "PowerPlane" (solid, remove dead copper, pour order 0): 0,2540 2060,2540 2060,0 0,0
GND on Bottom Layer "Bottom_GND" (solid, remove dead copper, pour order 2): 0,2540 2060,2540 2060,0 0,0
GND on Ground Plane (split plane): 2043.9,20.03 20.1,20.03 20.1,2521.9 2043.9,2521.9

## Other copper
Power:
  pour cut-out: 1200,1150 1230,1150 1230,925 1200,925
Bottom Layer:
  pour cut-out: 1219.7,1050 1233,1080.7 1233,1100.12 1242,1108 1257,1100.12 1252.67,1050 1266,1050 1285,1069 1279,1075 1279,1158 1203.18,1158 1201,1160.18 1186,1145.18 1186,1076 1193.7,1076
  pour cut-out: 1050,230 779,230 779,599 975,795 980,795 1040,735 850,545 1085,545 1085,495 1135,445 1135,315

## Silkscreen, mask and mechanical layers (free items; w line width, h text height)
Top Overlay:
  drawing of 18 lines, arcs and shapes, not listed
  text "CEC1702 Target Board / For ChipWhisperer 308T" at 600,2295 h40
  text "CLKIN" at 250,2040 h60
  text "SYNCOUT" at 180,1750 h60
  text "P104/TX" at 180,1565 h40
  text "P105/RX" at 180,1465 h40
  text "P030" at 180,1360 h40
  text "Vfuse" at 1700,1355 h40
  text "P017" at 180,1260 h40
  text "nRST" at 175,1158 h40
  text "SCK" at 175,1065 h40
  text "MISO" at 175,960 h40
  text "MOSI" at 175,870 h40
  text "Optional / Ext Crystal" at 1470,800 h40
  text "LEDs" at 1585,680 h40
  text "P156" at 1580,605 h40
  text "SPI_EN" at 175,567 h40
  text "P157" at 1580,535 h40
  text "CS" at 180,470 h40
  text "P046" at 1580,465 h40
  text "JTAG" at 280,180 h60
  text "P040" at 1150,180 h40 r90
  text "P031" at 1220,180 h50 r90
  text "P026" at 1310,180 h60 r90
  text "P053" at 1410,180 h60 r90
  text "P054" at 1510,180 h60 r90
  text "P027" at 1610,180 h60 r90
  text "P107" at 1710,180 h60 r90
  text "P120" at 1810,180 h60 r90
  text "P112" at 1880,180 h40 r90
  text "P113" at 1895,175 h40
Bottom Overlay:
  lines w11.81: 1705,1505 1705,1815 1835,1815 1835,1505 ; 1705,1505 1835,1505 ; 1705,1505 1705,935 1835,935 1835,1505 ; 1705,1505 1835,1505
  text "JP1 Connects VFuse/VREF to 3.3V. /  / Jumper VFuse to 1.60V (use VAdj on CW308) / for EFUSE programming." at 1680,2050 h45 r90
  text "+3V3" at 1790,1790 h45 r90
  text "VREF/VFUSE" at 1795,1390 h45 r90
  text "C" at 795,795 h250
  text "p" at 795,510 h250
  text "NewAE Technology Inc. / NAE-C308T-CEC1702-02 / ROHS / Pb-Free" at 255,425 h60 r270
  text "W" at 770,275 h250